# Altium PCB 0.PCB1.PcbDoc (part 8 of 8)
Units mil, origin at the board's own origin, x right, y up, seen from the top; angles counter-clockwise.
Board outline 3897.64 x 3897.64 mil, 6 copper layers (Top Layer, Layer 1, Layer 3, Layer 4, Layer 2, Bottom Layer), stack 60.567 mil thick; 715 components, 563 nets, 2530 pads, 1442 vias.
Unrouted connection lines stored in the file: 6.
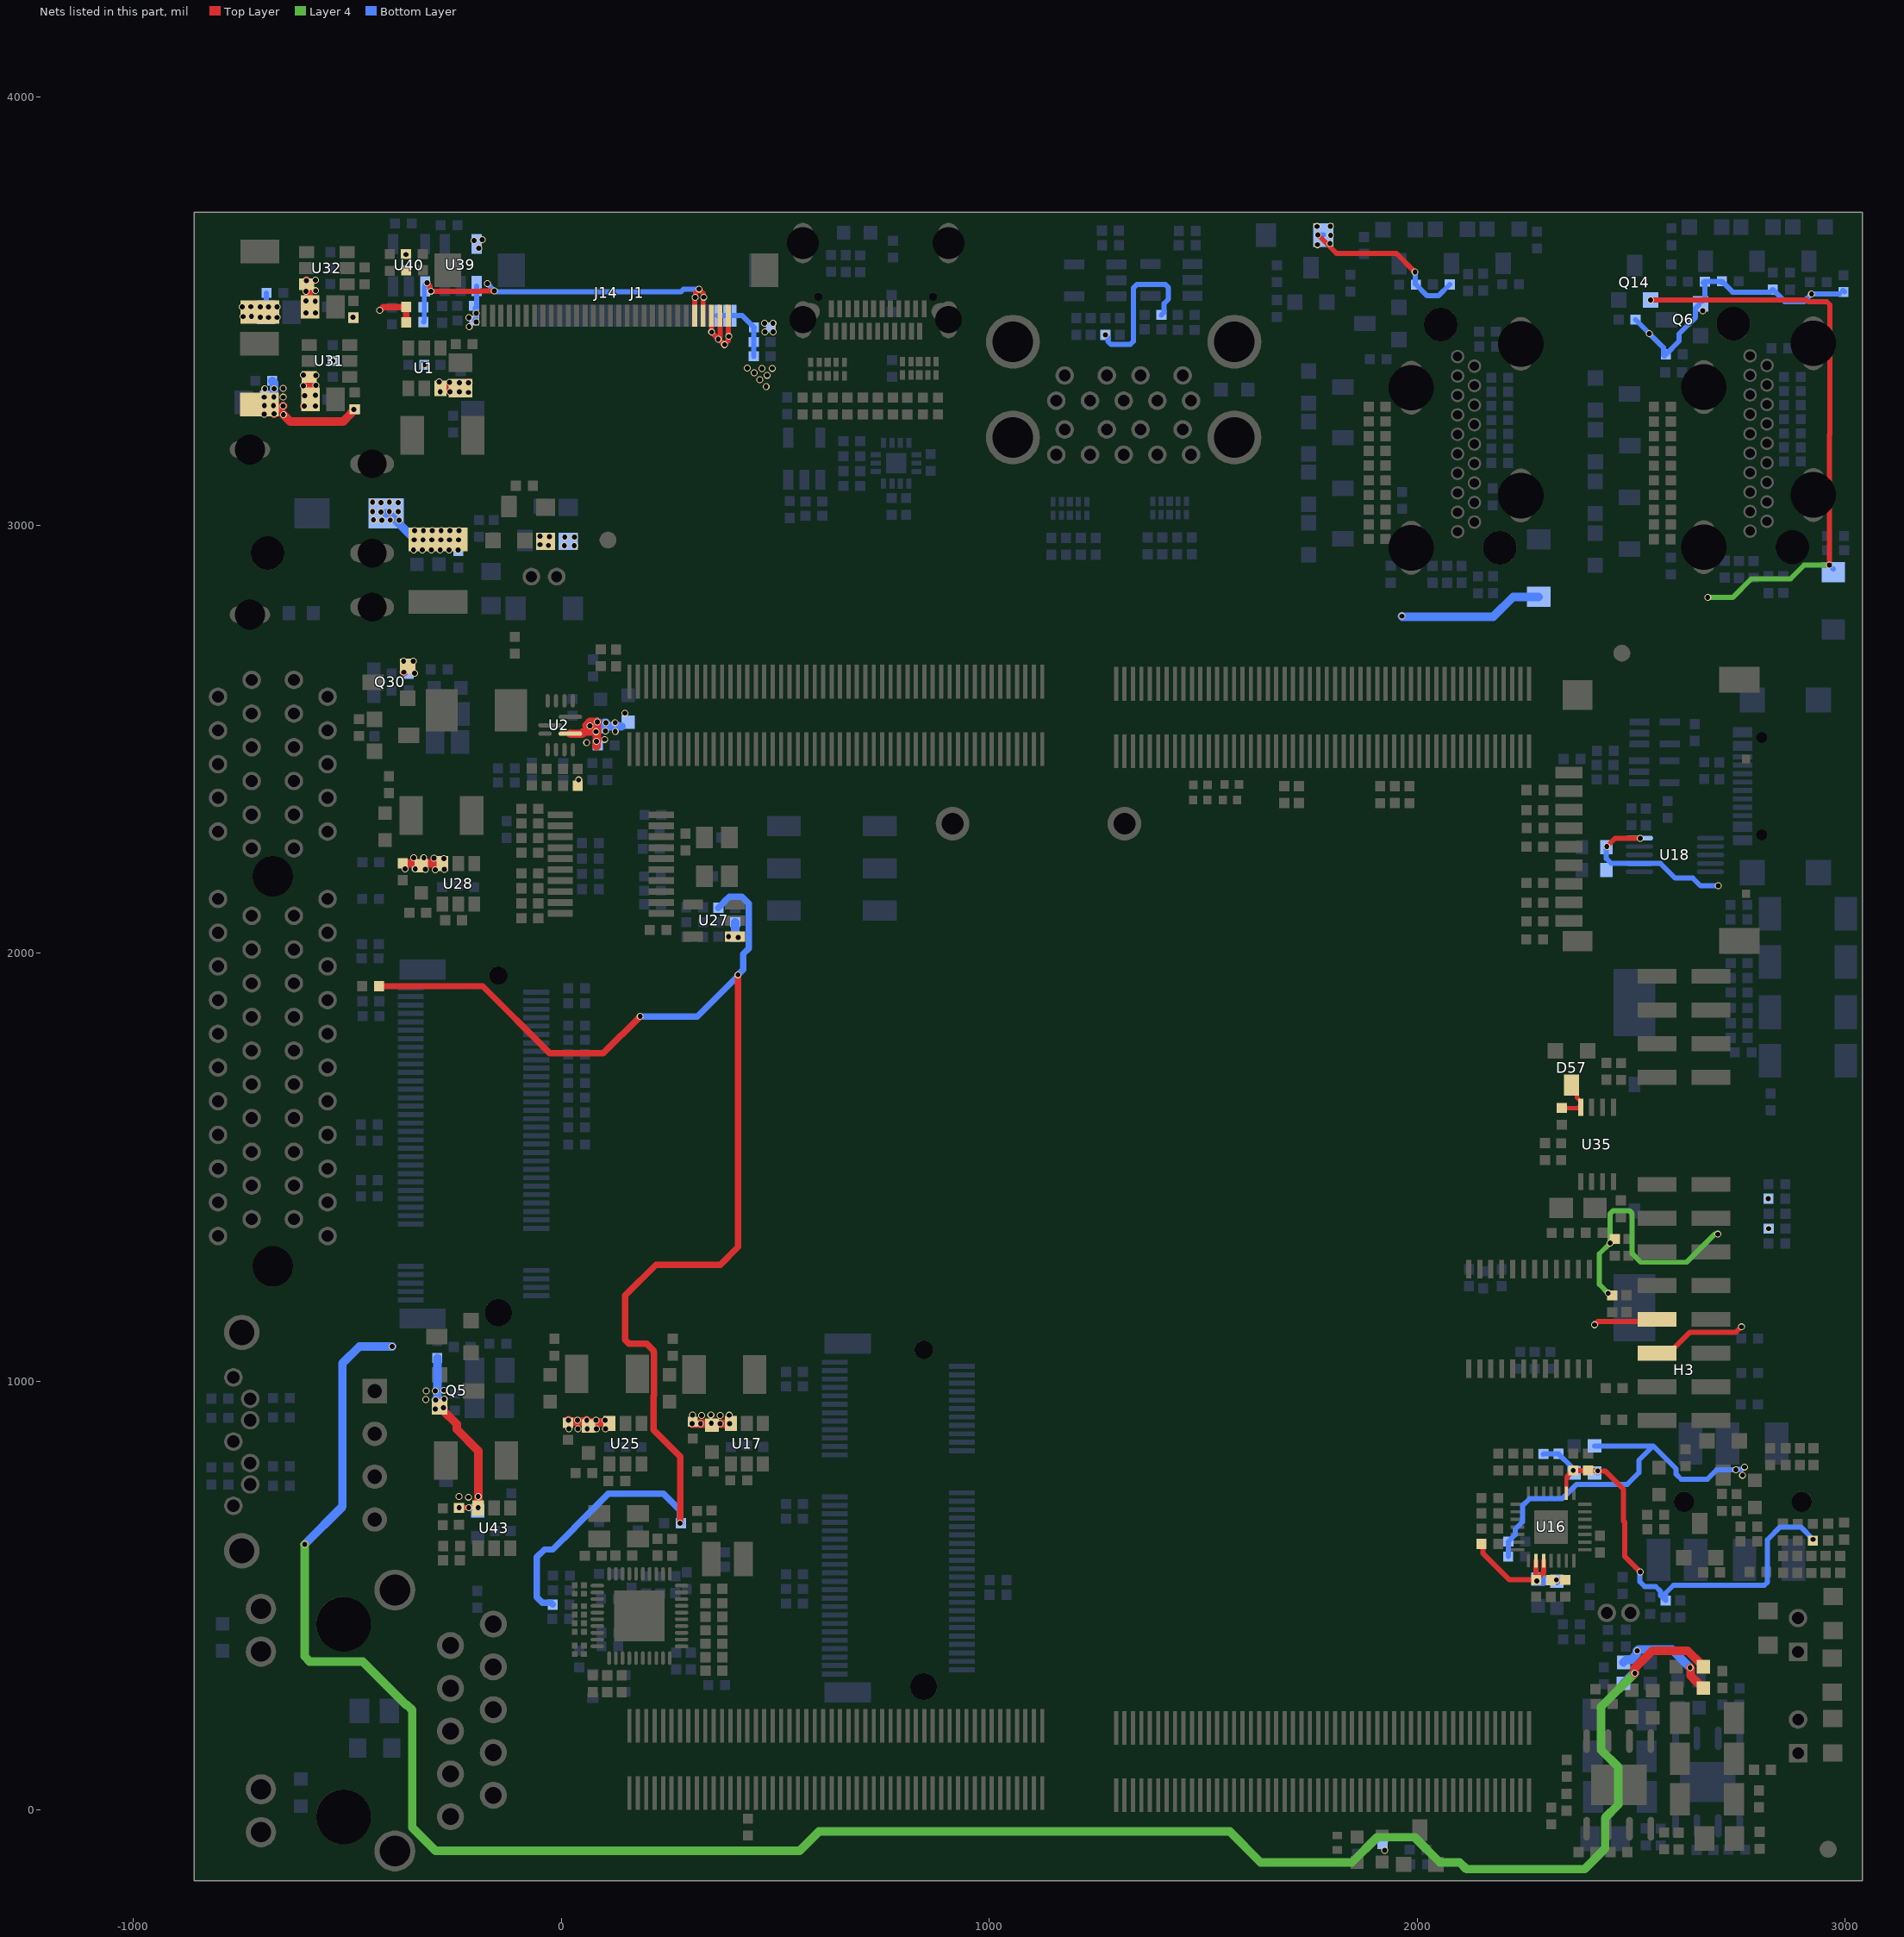
[diagram p12: the nets of this part, all layers, seen from the top]

## Via types
v1: diameter 16.14, hole 11.81, Top Layer to Bottom Layer, tented both sides, 1434 vias
v2: diameter 16.14, hole 11.81, Top Layer to Bottom Layer, 8 vias

## Nets (pads, with @x,y where several pads share a name; then routed paths per layer and width w, separated by ;. In a path a pad name is that pad's centre, name@x,y a point inside that pad or via, vN(x,y) a via of type N, cw(c..) or ccw(c..) an arc to the next point about the centre after c; other vN are vias at no path point) (continued)
VCC_3V3_S0: C35.2 C36.2 C230.1 C231.1 C232.2 D49.2 H3.6 L15.1 L21.2 Q6.1 R6.2 R25.1 R26.1 R27.1 R28.1 R29.1 R30.1 R31.1 R32.1 R33.1 R34.1 R65.2 R128.1 R151.1 R153.1 R154.1 R157.1 R158.1 R170.1 R178.1 R179.1 R246.2 R272.2 R328.1 R382.2 R383.2 U18.7 U18.10 | length 7134
  Top Layer w12: v1(1768.1,3678.4) 1811.6,3634.9 1951.4,3634.9 v1(1994.9,3591.4) ; v1(2443.08,2249.38) 2462.43,2268.72 v1(2521.06,2268.72) ; v1(2446.22,1206) 2447.01,1205.21 2451.27,1205.21 R27.1@2455.6,1200.88 ; v1(2450.8,1323.3) 2452.42,1323.3 R28.1@2461.7,1332.58 ; H3.6@2560.51,1066.24 2588.27,1066.24 2637.23,1115.2 2744.58,1115.2 2756.78,1127.4 v1(2757.9,1127.4)
  Top Layer w15: R328.1@-425.42,1923.3 -183.3,1923.3 -26.4,1766.4 98.4,1766.4 v1(184.6,1852.6) ; v1(-423.7,3502.1) -415.8,3510 R26.1@-361.96,3510 -362.02,3509.94 -362.02,3474.48 R25.1@-362.9,3473.6 ; v1@278.6,671.1 278.6,824 215.8,886.8 215.8,966.3 217.06,967.56 217.06,1067.64 215.8,1068.9 215.8,1072 199.5,1088.3 158.19,1088.3 149.4,1097.09 149.4,1200.6 221.5,1272.7 371.8,1272.7 413.2,1314.1 v1(413.2,1949.9)
  Layer 4 w12: v1(2446.22,1206) 2425.4,1226.82 2425.4,1297.9 v1(2450.8,1323.3) 2450.8,1391.87 2457.83,1398.9 2495.27,1398.9 2502.3,1391.87 2502.3,1298.2 2522.1,1278.4 2629.4,1278.4 2694.9,1343.9 v1(2702.2,1343.9)
  Bottom Layer w12: C230.1@-689.04,3497.48 -688.51,3498 C230.1@-688.51,3510.09 ; C231.1@-688.51,3542.78 C230.1@-688.51,3510.09 ; v1(-683.39,3510.09) C230.1@-688.51,3510.09 ; v1(1271.4,3444.75) 1277.2,3438.95 1277.2,3429.53 1284.23,3422.5 1329.67,3422.5 1336.7,3429.53 1336.7,3554.23 1344.7,3562.23 1411.87,3562.23 1418.9,3555.2 1418.9,3528.3 1408.48,3517.88 1408.48,3497.13 R34.1@1402.68,3491.33 ; v1(1768.1,3678.4) 1768.46,3678.04 D49.2@1780.63,3678.04 ; v1(1994.9,3591.4) 1995.69,3590.61 1995.69,3563.55 2023.1,3536.14 2049.67,3536.14 R178.1@2075.98,3562.44 ; R29.1@2212.72,590.8 2212.87,590.95 2212.87,625.75 R30.1@2213.02,625.9 2229.1,641.98 2229.1,654.9 2246,671.8 2246,709.5 2262.2,725.7 2338.3,725.7 2372.4,759.8 2491,759.8 2517.7,786.5 2517.7,815.81 2551.24,849.36 ; L15.1@2414.34,849.36 2551.24,849.36 ; C36.2@2441.9,2248.32 2441.95,2248.27 2441.95,2221.32 2453.12,2210.15 U18.7@2519.02,2210.15 2568.15,2210.15 2602.2,2176.1 2643.6,2176.1 2661.8,2157.9 v1(2703.2,2157.9) ; R170.1@2509.98,3480.31 2575.02,3415.27 R151.1@2575.02,3399.21 ; U18.10@2519.02,2269.21 2520.57,2269.21 v1(2521.06,2268.72) ; R151.1@2577.1,3395.31 2575.02,3397.39 R151.1@2575.02,3399.21 ; R151.1@2578.2,3399.21 R151.1@2575.02,3399.21 ; R151.1@2580.82,3399.21 2611.76,3430.15 2611.76,3447.17 2650.2,3485.61 2650.2,3507.21 Q6.1@2658.5,3515.51 ; Q6.1@2662.1,3523.11 2665.68,3523.11 2671.98,3529.41 R158.1@2671.98,3569.11 2672.43,3569.56 2708.05,3569.56 R157.1@2710.4,3567.21 ; R158.1@2667.97,3566.88 R158.1@2669.8,3568.71 ; R157.1@2711.72,3570.01 2737.02,3544.71 2817.77,3544.71 2824.8,3544.73 R153.1@2830.6,3550.53 2858.72,3522.41 2903.5,3522.41 v1(2921.3,3540.21) R154.1@2986.8,3540.21 ; v1@2745.9,793.47 2699.73,793.47 2677.73,771.47 2616.72,771.47 2605.06,783.12 2605.06,795.54 2551.24,849.36 ; v1@2746.24,794.26 2758.52,794.26 2764.33,800.06 v1(2764.88,800.06) ; R154.1@2994.4,3548.09 2994.9,3548.59 R154.1@2997.9,3545.59
  Bottom Layer w15: R383.2@-19.78,478.6 -24.08,482.9 -43.7,482.9 -56.7,495.9 -56.7,589.5 -38.9,607.3 -19.9,607.3 30.35,657.55 30.35,658.18 109.87,737.7 239.21,737.7 277.18,699.72 277.18,689.72 277.62,689.28 277.62,671.08 R382.2@280,668.7 278.2,668.7 v1(277.8,669.1) ; v1(184.6,1852.6) 318,1852.6 v1@411.9,1946.5 ; R246.2@367.3,2106.43 382.21,2121.34 382.21,2121.84 392.67,2132.31 422.41,2132.31 438.2,2116.51 438.2,2011.7 425.3,1998.8 425.3,1962 v1(413.2,1949.9)
  other v1: 1923.8,-95.53 2760.17,780.95 2744.98,793.47 2821.14,1357 2820.44,1426.7 -319.6,3374.91 -533.61,3383.8 2542.5,3447.79 -683.39,3485.37 -703.07,3485.88 -663.71,3485.5 -486.41,3486.13 -743.2,3487.5 -723.52,3488.04 2666.9,3501.2 -745,3510.2 -703.07,3509.77 -663.71,3510.3 -725.2,3510.5 1767,3655.5 1796.4,3657.8 1797.55,3677.45 1766.03,3697.98 1796.8,3698.7
VCC_5V0_S0: C184.1 C185.1 C225.2 C226.1 C227.1 D26.2 D33.2 H3.8 L20.2 Q14.1 R36.2 R37.1 R127.1 R342.1 R348.1 U27.1 U39.5 | length 2471.4
  Top Layer w12: v1(2414.6,1132.4) 2421.92,1139.72 2555.25,1139.72 H3.8@2560.51,1144.98 ; v1(2545.6,3526.21) 2909.74,3526.21 2913.81,3522.14 2956.97,3522.14 2964,3515.11 2964,3212.97 2963.1,3212.07 v1(2963.1,2906.91)
  Top Layer w20: L20.2@-704.59,3282.13 -696.73,3282.13 L20.2@-693.64,3279.04 ; v1(-693.29,3279.38) L20.2@-693.64,3279.04 ; L20.2@-672.15,3279.05 -672.1,3279 L20.2@-672.1,3267.35 ; v1(-672.15,3279.74) -672.15,3276.55 -669.32,3273.71 -654.1,3273.71 v1(-649.54,3278.27) ; v1(-670.8,3260.1) -670.8,3264.57 -674.48,3268.25 -682.85,3268.25 L20.2@-693.64,3279.04 ; v1(-648.9,3258.6) -632.9,3242.6 -509.03,3242.6 -491.18,3260.44 -491.18,3261.75 C225.2@-482.19,3270.74 ; v1(2637.41,331.25) 2638.76,329.9 2638.76,312 2649.93,300.82 2651.03,300.82 R342.1@2662.21,289.65
  Layer 4 w12: v1(2678.76,2831.29) 2736.79,2831.29 2780.4,2874.9 2872.1,2874.9 2904.11,2906.91 v1(2963.1,2906.91)
  Bottom Layer w12: Q14.1@2545.5,3526.51 2545.6,3526.41 v1(2545.6,3526.21) ; v1(2963.1,2906.91) D26.2@2972.23,2897.78
  Bottom Layer w20: C226.1@-682.69,3286.9 -682.69,3287.95 v1(-671.24,3299.4) ; C226.1@-676.95,3293 -670.8,3299.14 v1@-670.8,3318.7 ; C227.1@-675.09,3337.2 -670.79,3332.9 v1(-670.79,3319.08) ; C184.1@406.66,2072.72 C185.1@406.66,2039.01 412.19,2039.01 v1(413.8,2037.4) ; v1(1964.6,2787.7) 1965.7,2786.6 2178.01,2786.6 2224.13,2832.72 D33.2@2283.7,2832.72 ; R348.1@2482.01,343.65 2487.76,349.4 2499.54,349.4 2513.41,363.27 2513.41,370.31 2516.5,373.4 2595.26,373.4 v1(2637.41,331.25)
  other v1: 2514.1,371 391.17,2039.4 30.7,2952.3 7.4,2952.5 8.5,2972.3 30.8,2972.7 -693.6,3259.7 -484.16,3270.2 -693.59,3299.07 -649.2,3299.2 -692.35,3319.12 -649.2,3319.6 478.8,3324.2 463.9,3339.8 481.2,3350.5 451.34,3356.2 468.8,3366.2 435.1,3367.4 493.1,3366.5 475.81,3451.87 495.5,3451.87 475.15,3471.63 494.84,3471.54 -192.3,3646.9 -203.59,3665.09 -184,3667
VCC_12V: C1.1 C2.1 C3.1 C12.1 C13.1 C17.1 C18.1 C19.1 C160.1 C161.1 C195.1 C196.1 C228.1 C229.1 C233.1 C234.1 C249.1 C250.1 C293.1 C294.1 D1.2 F1.2 Q5.2 Q30.2 R9.1 R131.1 R255.1 R319.1 R341.1 R347.1 U1.3 U2.1 U17.3 U25.3 U28.3 U31.3 U32.3 U43.3 | length 6403
  Top Layer w12: C294.1@-238.62,704.35 -238.39,704.58 -194.05,704.58 v1(-193.82,704.81)
  Top Layer w20: v1(-600.2,3278.5) -597.55,3278.5 -585.89,3290.15 C228.1@-585.89,3293.8 -587.31,3295.22 -587.31,3344.98 U31.3@-588.74,3346.4 ; v1(-596.26,3496.3) -596.26,3496.94 -586.21,3506.99 C233.1@-586.21,3510.18 -590.28,3514.25 -590.28,3559.49 -594.06,3563.27 U32.3@-594.35,3563.27 -594.35,3570.55 v1(-595.5,3571.7) ; C196.1@-369.98,2210.28 -369.51,2209.81 -278.25,2209.81 U28.3@-277.78,2209.34 ; v1(-367.7,2656.9) -366.85,2657.75 -366.85,2662.85 Q30.2@-358.85,2670.85 ; Q5.2@-284.32,940.7 -276.75,940.7 v1(-274.88,938.84) ; U1.3@-282.45,3320.27 -235.39,3320.27 C12.1@-234.9,3320.77 -228.99,3320.77 -216.66,3333.1 v1(-216.5,3333.1) ; Q5.2@-276.32,938.6 -276.32,932.7 -244.08,900.45 -244.08,888.38 -193.82,838.12 v1(-193.82,704.81) ; v1(16.67,909.2) 16.1,908.62 C161.1@16.1,903.18 19.7,906.78 C160.1@56.39,906.78 ; U2.1@21.5,2513.1 21.85,2512.75 48.63,2512.75 53.71,2517.83 v1(81.37,2517.83) 83.77,2517.83 83.81,2517.79 v1@83.81,2495.69 ; 59.09,2532.48 67.51,2540.91 84.59,2540.91 v1(84.74,2540.76) ; v1(59.72,909.2) 59.72,899.78 C160.1@63.5,896 C160.1@71.72,904.22 ; C160.1@64.6,904.22 U25.3@108.25,904.22 ; v1(82.14,2495.32) 82.78,2495.32 82.78,2484.04 82.93,2483.89 ; v1@83.81,2517.99 v1@83.81,2539.49 ; U25.3@107.75,904.22 111.56,900.41 U25.3@112.8,901.64 ; v1(305.85,901.62) 307.67,903.44 C250.1@307.67,905.78 ; C250.1@310.58,902.87 312.45,901 v1(325.53,901) C249.1@349.17,901 ; v1(350.7,902.2) 350.7,899.47 C249.1@352.27,897.9 355.37,901 392.81,901 U17.3@393.4,901.59 ; v1(393.4,901.4) 396.31,901.4 U17.3@396.5,901.59 ; v1(2508.41,318.35) 2508.21,318.55 2508.21,330.05 2548.82,370.66 2631.94,370.66 2662.76,339.84 2662.76,339.3 R341.1@2668.51,333.55
  Layer 4 w20: v1(-599.4,619.2) -599.4,357.52 -587.68,345.8 -463.6,345.8 -361.9,244.1 -359.62,244.1 -347.9,232.38 -347.9,-42.4 -293.6,-96.7 557.2,-96.7 602.3,-51.6 1562.32,-51.6 1634.12,-123.4 1847.6,-123.4 1906.3,-64.7 1994.1,-64.7 2053.2,-123.8 2099.4,-123.8 2114.9,-139.3 2390.9,-139.3 2439.1,-91.1 2439.1,-19.5 2469.7,11.1 2469.7,99.4 2429.8,139.3 2429.8,239.74 v1(2508.41,318.35)
  Bottom Layer w12: C293.1@-194.62,697.87 -194.62,704.01 v1(-193.82,704.81)
  Bottom Layer w20: v1(-599.4,619.2) -511.1,707.5 -511.1,1042.1 -471.5,1081.7 v1(-394.9,1081.7) ; D1.2@-408.89,3027.7 -402.98,3027.7 -352.53,2977.25 -342.75,2977.25 C1.1@-337,2971.5 -336.5,2971 C1.1@-336.5,2970.2 ; v1(-293.02,956.59) -288.72,960.89 R319.1@-288.72,1054.82 ; v1@-288.72,950.32 -277.24,938.84 v1(-274.88,938.84) ; v1(84.74,2540.76) 86.1,2539.4 86.1,2535.95 91.74,2530.31 91.95,2530.31 100.46,2538.82 v1(104.32,2538.82) ; C18.1@103.61,2530.1 135.06,2530.1 135.17,2529.99 C17.1@140.81,2529.99 ; R347.1@2481.91,292.55 2481.91,294.65 2501.16,313.9 2503.96,313.9 v1(2508.41,318.35)
  other v1: -238.27,704.7 -215.99,704.81 -216.67,729.63 -238.57,731.03 -193.87,731.03 17.7,889.5 39.22,889.5 60.75,889.5 82.27,889.5 103.8,889.5 371.2,901 38.2,909.2 81.25,909.2 102.77,909.2 306.81,921.29 328.32,920.7 371.38,920.7 392.89,921.08 349.8,921.86 -294.3,935.6 -315.9,957.5 -273.42,958.47 -315.4,978 -294.1,977.8 -273.8,979.3 -317.5,2196.2 -294,2195.5 -273,2196.2 -364.3,2197.3 -341,2197.4 -273.8,2221.4 -297.3,2222.1 -344.1,2223.2 -320.8,2223.3 40.71,2405.16 59.71,2492.09 101.36,2499.59 126.34,2517.99 103.92,2519.11 67.31,2531.61 126.14,2538.89 149.18,2561.1 -342.3,2654.2 -368.1,2682.1 -345.2,2682.3 -344.83,2941.9 -324.08,2941.9 -303.34,2941.9 -282.59,2941.9 -261.85,2941.9 -241.1,2941.9 -29.8,2952.8 -49.37,2954.95 -343.53,2965.8 -322.78,2965.8 -302.04,2965.8 -281.29,2965.8 -260.55,2965.8 -239.8,2965.8 -27.5,2973.6 -49.37,2974.63 -342.63,2987.7 -321.88,2987.7 -301.14,2987.7 -280.39,2987.7 -259.65,2987.7 -238.9,2987.7 -418.86,3011.41 -438.53,3012.38 -399.2,3012.3 -378.4,3011.7 -420.96,3031.21 -440.63,3032.18 -401.3,3032.1 -380.5,3031.5 -420.86,3052.81 -380.4,3053.1 -440.53,3053.78 -401.2,3053.7 -573.7,3278.8 -599.5,3303 -573.7,3303.4 -216.92,3310.35 -282.4,3311.8 -259.8,3311.6 -237.4,3311.6 -602.3,3325.7 -573.1,3326.6 -237.4,3333.2 -260.7,3334.2 -284.8,3334.6 -572.8,3349.7 -602.4,3350.7 -573.8,3496 -574.6,3523.2 -596.1,3524 -596,3546.1 -573.6,3547.9 -573.8,3572.8
VCC_RTC: C237.1 D57.3 U35.8 | length 108
  Top Layer w10: C237.1@2337.7,1638.68 2375.38,1638.68 U35.8@2380.1,1643.4 ; D57.3@2361.4,1695.5 2373.4,1683.5 2373.4,1662.61 2381.91,1654.09 U35.8@2381.91,1640.31
VCCA1V8_CODEC: C108.1 C114.1 C123.1 L4.2 L14.2 R121.1 U16.2 U16.3 | length 338.9
  Top Layer w12: R121.1@2149.95,620.45 2153.33,617.07 2153.33,598.77 2215.65,536.45 2276.31,536.45 v1(2279.16,533.6) ; U16.2@2277.54,581.18 2277.87,580.84 C114.1@2277.87,536.78 ; C114.1@2278.21,536.45 2295.25,553.49 U16.3@2295.25,581.18 ; v1(2325.31,536.34) 2345.7,536.34 C123.1@2345.81,536.23
  Bottom Layer w20: v1(2279.16,533.6) L14.2@2325.31,533.6
VCCA3V3_CODEC: C109.1 C110.1 C124.1 L5.2 L15.2 R112.2 R113.2 R125.1 U16.16 | length 1114.7
  Top Layer w10: U16.16@2348.4,738.66 2348.4,773.2 2349.77,774.57
  Top Layer w12: 2349.77,774.57 2351.21,776.01 2351.21,778.75 v1(2364.41,791.95) C110.1@2399.41,791.95 2399.91,791.45 2421.41,791.45 v1(2421.91,790.95) 2422.7,790.16 2439.97,790.16 2482.26,747.87 2482.26,674.22 2484.68,671.81 2484.68,591.55 v1(2520.91,555.32) ; R113.2@2924.31,628.04 2924.31,630.42 v1(2924.81,630.92)
  Bottom Layer w12: R112.2@2294.91,830.23 2295.11,830.43 2329.91,830.43 C124.1@2330.11,830.63 2360.96,799.78 2360.96,795.4 v1(2364.41,791.95) 2366.61,789.75 L5.2@2370.71,789.75 ; L15.2@2418.79,789.65 2420.61,789.65 v1(2421.91,790.95) L15.2@2421.91,786.52 ; v1(2520.91,555.32) 2520.11,554.53 2520.11,532.23 2520.01,532.12 2531.47,520.65 2557.34,520.65 2568.81,509.19 2568.81,499.94 R125.1@2580.47,488.27 2580.47,505.59 2598.76,523.89 2811.1,523.89 2818.4,531.19 2818.4,630.6 2847.7,659.9 2895.83,659.9 v1(2924.81,630.92)
VDD_CAM0_5V: C29.1 C30.1 J1.1 J1.2 J1.3 R37.2 | length 165.4
  Bottom Layer w12: J1.3@364.21,3489.66 J1.1@403.58,3489.66 422.96,3489.66 R37.2@450.52,3462.1 450.22,3461.8 450.22,3395 C29.1@449.92,3394.7
VDD_LCD0_3V3: C260.1 C261.1 J14.4 J14.5 R301.1 R303.1 U40.1 | length 898.7
  Top Layer w12: v1(-313.53,3566.4) -313.53,3565.28 -306.28,3558.03 -306.28,3552.31 -300.42,3546.45 -188.57,3546.45 -187.32,3547.7 v1(-156.5,3547.7) ; J14.5@311.98,3489.52 312.08,3489.62 312.08,3529.96 313.2,3531.08 v1(313.2,3532.2) 313.81,3532.81 313.81,3542.19 v1@322.3,3550.68 ; v1(322.3,3551.8) v1@322.3,3550.68 ; J14.4@331.66,3489.52 v1@331.66,3532.64 ; v1(332.88,3532.64) 332.09,3533.44 332.09,3540.89 v1@322.3,3550.68
  Bottom Layer w12: C261.1@-321.62,3475 -319.81,3476.81 -319.81,3509.3 U40.1@-319.81,3556.18 ; U40.1@-318,3557.99 -318,3561.93 v1(-313.53,3566.4) ; v1(-172,3564.4) -172,3563.8 -157.55,3549.35 v1@-157.55,3548.45 ; v1(-156.5,3547.7) -155.71,3546.91 -151.98,3546.91 -150.33,3545.25 63.31,3545.25 63.44,3545.13 279.69,3545.13 286.36,3551.8 v1(322.3,3551.8)
  other v1: -304,3546.8 -362.3,3632.4
VDD_LCD0_5V: C256.1 C257.1 J14.1 J14.2 J14.3 U39.1 | length 287.7
  Top Layer w12: J14.3@351.35,3489.52 351.45,3489.43 351.45,3451.55 v1(351.7,3451.3) 351.7,3450.18 361.05,3440.83 361.05,3440.75 v1(366.97,3434.83) ; v1@368.22,3434.7 368.22,3434.63 380.85,3422 v1(381.9,3422) ; v1@368.2,3436.5 371.03,3439.33 J14.2@371.03,3489.52 ; v1@380.9,3422.6 381.38,3422.6 390.72,3431.94 J14.1@390.72,3489.52
  Bottom Layer w12: C256.1@-202.92,3478.6 -198.92,3482.6 -198.92,3494.28 v1(-198.12,3495.07) ; v1@-200.13,3495.07 C257.1@-200.13,3508 ; C257.1@-197.33,3508 U39.1@-197.33,3558.67
  other v1: 391.52,3441.21 -214.97,3464.12 -198.7,3475.2 -215.78,3484.98
pads on no net: BTB_1.21 BTB_1.22 BTB_1.24 BTB_1.25 BTB_1.26 BTB_1.27 BTB_1.29 BTB_1.30 BTB_1.32 BTB_1.33 BTB_1.34 BTB_1.35 BTB_1.67 BTB_1.68 BTB_1.69 BTB_1.70 BTB_1.72 BTB_1.73 BTB_1.75 BTB_1.76 BTB_1.77 BTB_1.78 BTB_1.80 BTB_1.81 BTB_2.33 BTB_2.34 BTB_2.35 BTB_2.36 BTB_2.38 BTB_2.39 BTB_2.41 BTB_2.42 BTB_2.43 BTB_2.44 BTB_2.52 BTB_2.53 BTB_2.54 BTB_2.55 BTB_2.56 BTB_2.57 BTB_2.58 BTB_2.59 BTB_2.60 BTB_2.61 BTB_2.62 BTB_2.63 BTB_2.64 BTB_2.67 BTB_2.69 BTB_2.70 BTB_2.76 BTB_2.78 BTB_2.80 BTB_2.82 BTB_2.83 BTB_2.85 BTB_2.86 BTB_2.87 BTB_2.90 BTB_2.91 BTB_3.6 BTB_3.14 BTB_3.57 BTB_4.52 BTB_4.53 BTB_4.54 BTB_4.55 BTB_4.56 BTB_4.57 BTB_4.58 BTB_4.59 CR1.0 J1.13 J1.14 J5. J7. J8.@600.94,3533.73 J8.@868.66,3533.73 J9.14 J9.15 J9.17 J9.18 J11. J11.7 J11.8 J13. J13.6 J13.8 J13.9 J13.10 J13.11 J13.12 J13.13 J13.14 J13.15 J13.16 J13.17 J13.19 J13.20 J13.21 J13.22 J13.23 J13.32 J13.34 J13.36 J13.38 J13.40 J13.42 J13.44 J13.46 J13.48 J13.50 J13.54 J13.58 J13.59 J13.60 J13.61 J13.62 J13.64 J13.65 J13.66 J13.67 J13.68 J13.70 J13.71 J13.73 J14.14 J16. J17. J19. J19.5 J19.6 J19.7 J19.8 J19.11 J19.13 J19.17 J19.19 J19.20 J19.22 J19.23 J19.24 J19.25 J19.26 J19.28 J19.30 J19.32 J19.34 J19.36 J19.40 J19.42 J19.44 J19.46 J19.48 J19.56 J19.58 J19.67 J19.68 J19.69 J20. J20.A5 J20.A6 J20.A7 J20.A8 J20.A19 J20.A25 J20.A26 J20.A29 J20.A30 J20.A32 J20.B5 J20.B6 J20.B9 J20.B23 J20.B24 J20.B27 J20.B28 J20.B30 J24. MR1.Mark MR2.Mark MR3.Mark MR4.Mark MR5.Mark MR6.Mark U2.4 U4.1 U16.9 U16.25 U18.4 U18.5 U18.6 USBC1. USBC1.A4B9 USBC1.A5 USBC1.A8 USBC1.B4A9 USBC1.B5 USBC1.B8
copper on no net:
  other v2: 1259.09,161.13 2298.46,161.13 122.09,166.13 1161.46,166.13 1259.09,2600.13 2298.46,2600.13 122.09,2605.13 1161.46,2605.13

## Polygon pours and split planes (outlines as drawn)
GND on Bottom Layer "GND_L06_P090" (solid, remove dead copper, pour order 90): -857.1,-166.7 3040.6,-166.7 3040.6,3730.9 -857,3730.9
3V3_DVDD_PHY1 on Bottom Layer "3V3_DVDD_PHY1_L06_P032" (solid, remove dead copper, pour order 32): 229.3,680.9 229.3,657.8 229.1,657.6 247.1,639.6 247.1,621.8 252.3,621.8 270.6,603.5 270.5,603.4 270.5,581.3 288.1,581.3 304.3,565.1 304.3,543.5 271.2,543.5 243.8,516.1 189.1,516.1 189.1,514.9 176.8,502.6 177,502.4 177,468.5 185.5,460 208,460 208,460.1 212.2,464.3 282.1,464.3 332.2,514.4 332.2,594.8 304.6,622.4 304.6,635.4 302.6,635.4 281.4,656.6 267.5,656.6 267.5,674.8 262.4,679.9
1V05_PHY1 on Bottom Layer "1V05_PHY1_L06_P025" (solid, remove dead copper, pour order 25): 404.6,625.1 405.1,624.6 447.7,624.6 447.7,601.9 467.8,581.8 467.8,251.5 424.4,208.1 36.5,208.1 4.2,240.4 4.2,331.9 17.8,345.5 53.2,345.5 60.5,338.2 60.2,337.9 60.2,253.2 65,248.4 138.7,248.4 167.4,277.1 170.1,274.4 351.3,274.4 362.1,285.2 362.1,302.9 372.3,313.1 388.1,313.1 394,319 390.2,322.8 390.2,542.7 404.1,556.6 404.1,624.9
1V05_DVDD_PHY1 on Bottom Layer "1V05_DVDD_PHY1_L06_P024" (solid, remove dead copper, pour order 24): 257.2,377.8 314.2,377.8 355.3,336.7 355.3,278.8 355.1,278.6 238.9,278.6 223.9,293.6 223.9,378.18
1V05_AVDD_PHY1 on Bottom Layer "1V05_AVDD_PHY1_L06_P023" (solid, remove dead copper, pour order 23): 105.9,369.7 116.9,380.7 116.9,500 125.1,508.2 175.5,508.2 175.5,525.7 167.1,534.1 50.1,534.1 35.2,519.2 35.2,377.5 45.3,367.4 86,367.4
NetC303_1 on Bottom Layer "NETC303_1_L06_P084" (solid, remove dead copper, pour order 84): 2666.8,189.5 2666.8,119.8 2659.7,112.7 2614,112.7 2614,4.3 2577.6,-32.1 2523.2,-32.1 2523.2,-91.2 2514.2,-100.2 2511.1,-97.1 2451.3,-97.1 2451.3,253.4 2422.9,281.8 2422.9,307.1 2444.9,307.1 2473.5,278.5 2496.5,278.5 2496.5,285.3 2519.9,308.7 2519.4,309.2 2519.4,354.6 2524.7,354.6 2530.6,360.5 2568,360.5 2591.3,337.2 2591.3,143.2 2596.3,138.2 2619.5,138.2 2637,155.7 2637,189.8
VCC_3V3_S0 on Bottom Layer "VCC_3V3_S0_L06_P078" (solid, remove dead copper, pour order 78): -8.6,467.7 -10.9,465.4 -82.5,465.4 -105.7,488.6 -105.7,599.5 -92.6,599.5 57.3,749.4 276.8,749.4 305.1,721.1 305.1,658.5 267.8,658.5 264.6,661.7 264.6,685.3 76.2,685.3 -32.4,576.7 -32.4,499.4 -24.2,491.2 -23.7,491.7 -8.6,491.7
GND on Bottom Layer "GND_L06_P022" (solid, remove dead copper, pour order 22): -258.4,2466 -257.4,2465 -213,2465 -213,2652.9 -241.4,2681.3 -277.6,2681.3 -277.6,2654.2 -257,2633.6 -257,2464.9
GND on Bottom Layer "GND_L06_P060" (solid, remove dead copper, pour order 60): -359.8,2926.4 -228.4,2926.4 -223,2921 -223,2885.6 -229.5,2879.1 -354.9,2879.1 -361.98,2886.18
VDD_LCD0_3V3 on Bottom Layer "VDD_LCD0_3V3_L06_P052" (solid, remove dead copper, pour order 52): -177.4,3578.7 -176.7,3579.4 338,3579.4 349.5,3567.9 349.5,3524.2 344.6,3519.3 343.3,3520.6 -166.3,3520.6 -185.5,3539.8 -185.5,3580.3
VCC5V0_USB20_HOST on Bottom Layer "VCC5V0_USB20_HOST_L06_P040" (solid, remove dead copper, pour order 40): 1471.2,3699.2 1553.6,3699.2 1578.8,3674 1578.8,3507.9 1570.5,3499.6 1505.6,3499.6 1498.8,3506.4 1498.8,3582.7 1497.3,3582.7 1495,3585 1494.1,3584.1 1453,3584.1 1453,3589 1446.6,3595.4 1446.6,3632.4 1459.9,3645.7 1459.9,3700.1
VCC_3V3_S0 on Bottom Layer "VCC_3V3_S0_L06_P077" (solid, remove dead copper, pour order 77): 2776.8,784.7 2731.4,739.3 2622.1,739.3 2532.3,829.1 2403,829.1 2394.7,837.4 2394.7,869.6 2400.8,875.7 2402.8,873.7 2574.4,873.7 2630.4,817.7 2777.7,817.7
VCC_3V3_S0 on Bottom Layer "VCC_3V3_S0_L06_P076" (solid, remove dead copper, pour order 76): -657.2,3469.8 -748.3,3469.8 -751.5,3473 -751.5,3538.3 -733.2,3556.6 -676.5,3556.6 -663.5,3543.6 -663.5,3525.3 -656.99,3525.3
VCC5V0_USB_S0 on Bottom Layer "VCC5V0_USB_S0_L06_P072" (solid, remove dead copper, pour order 72): 763.2,3045.6 764,3044.8 942.1,3044.8 1054.6,3157.3 1054.6,3540.1 1103.1,3588.6 1403.2,3588.6 1419.2,3604.6 1419.2,3731.6 918.1,3731.6 839.6,3653.1 839.6,3312.9 892.7,3259.8 892.7,3127 891.4,3127 873.9,3109.5 768.4,3109.5
VCC5V0_USB30_OTG on Bottom Layer "VCC5V0_USB30_OTG_L06_P042" (solid, remove dead copper, pour order 42): 1274,3700.64 1274,3584.3 1319.3,3584.3 1330.9,3572.7 1352.4,3572.7 1355.6,3575.9 1355.5,3576 1355.5,3700.74
VCC5V0_USB_S0 on Bottom Layer "VCC5V0_USB_S0_L06_P071" (solid, remove dead copper, pour order 71): 760.4,3046 761.3,3045.1 812.8,3045.1 819.3,3051.6 818.8,3052.1 818.8,3075.8 815.4,3075.8 799,3092.2 799,3109.2 767.1,3109.2 767.2,3109.1 767.2,3086.3 726.4,3086.3 721.1,3081 721.1,3044.94
SATA_12V on Bottom Layer "SATA_12V_L06_P036" (solid, remove dead copper, pour order 36): -457.5,737.1 -407.6,737.1 -358,786.7 -358,882.7 -305.5,935.2 -267.2,935.2 -234.7,967.7 -235,968 -235,1058.7 -225.2,1068.5 -163.6,1068.5 -154.8,1059.7 -155.6,1058.9 -155.6,762.5 -288.6,629.5 -470.1,629.5 -470.1,630.2 -483.8,643.9 -483.8,711.4
VDD_LCD0_5V on Bottom Layer "VDD_LCD0_5V_L06_P053" (solid, remove dead copper, pour order 53): -208.7,3581.9 -221,3569.6 -221,3470.2 -209.5,3458.7 -192.7,3458.7 -192.7,3459.4 -184.5,3467.6 -184.5,3582.7
VDD_CAM0_5V on Bottom Layer "VDD_CAM0_5V_L06_P048" (solid, remove dead copper, pour order 48): 358.7,3514.7 432.6,3514.7 462.4,3484.9 462.4,3382 439.1,3382 358.4,3462.7 358.4,3463.9
VDD_LCD0_3V3 on Bottom Layer "VDD_LCD0_3V3_L06_P051" (solid, remove dead copper, pour order 51): -334,3464.6 -311.1,3464.6 -310.4,3463.9 -291.7,3482.6 -291.7,3580.4 -299,3587.7 -334.5,3587.7 -334.5,3587.5 -342.7,3579.3 -342.7,3474.3
VCCA3V3_CODEC on Bottom Layer "VCCA3V3_CODEC_L06_P045" (solid, remove dead copper, pour order 45): 2283.9,842.2 2350.7,842.2 2390.5,802.4 2430.1,802.4 2430.1,770.9 2429.9,771.1 2351.9,771.1 2305,818 2284.5,818
VCC12V_PCIEx4 on Bottom Layer "VCC12V_PCIEX4_L06_P043" (solid, remove dead copper, pour order 43): -460.9,2634.3 -389.1,2634.3 -383.5,2639.9 -383.5,2682.3 -394.5,2693.3 -465.6,2693.3 -468.2,2690.7 -468.2,2639.9
VCC3V3_PCIECLK on Bottom Layer "VCC3V3_PCIECLK_L06_P037" (solid, remove dead copper, pour order 37): 72.8,2270.4 95.2,2292.8 201.5,2292.8 205.4,2288.9 203.6,2287.1 203.6,2121 231.7,2092.9 302.8,2092.9 313.3,2082.4 313.3,2024.9 310.6,2024.9 305.5,2019.8 148.7,2019.8 73.8,2094.7
M2PCIE_3V3 on Bottom Layer "M2PCIE_3V3_L06_P034" (solid, remove dead copper, pour order 34): -46.1,1815.4 -45.9,1815.6 26.8,1815.6 29.4,1813 29.3,1812.9 29.3,1581.3 -0.7,1581.3 -11.6,1592.2 -11.6,1728.5 -28.5,1745.4 -45.9,1745.4
M2PCIE_3V3 on Bottom Layer "M2PCIE_3V3_L06_P033" (solid, remove dead copper, pour order 33): -29.2,1918.7 -18.4,1929.5 26.7,1929.5 28.4,1927.8 28.4,1876.9 33.6,1876.9 68,1842.5 67.5,1842 67.5,1820.5 45.6,1820.5 45,1819.9 4.7,1860.2 4.7,1871.5 2.9,1871.5 -9.1,1883.5 -9.5,1883.1 -36.7,1883.1 -36.7,1917.8 -36.6,1917.9
3V3_AVDD_PHY1 on Bottom Layer "3V3_AVDD_PHY1_L06_P030" (solid, remove dead copper, pour order 30): 31,558.5 43.4,558.5 49.7,552.2 49.7,538.4 31.3,520 31.3,352.4 22.9,344 22.9,328.8 16.1,322 -1.9,322 -14.9,335 -14.9,417.3 3.2,435.4 3.2,559.5
1V8_DVDD_PHY1 on Bottom Layer "1V8_DVDD_PHY1_L06_P026" (solid, remove dead copper, pour order 26): 305.8,670.5 305.8,622.2 332,596 332,499.8 332.1,499.9 362.4,499.9 370.1,507.6 370.1,666.5 366.2,670.4
M2EKEY_3V3 on Bottom Layer "M2EKEY_3V3_L06_P009" (solid, remove dead copper, pour order 9): 782.3,1046.7 968.3,1046.7 968.3,1010.3 902.6,1010.3 881.1,988.8 881.1,367.6 896.7,352 897.1,352.4 966,352.4 966,320.1 965.4,319.5 965.1,319.8 837.4,319.8 782.3,374.9
VCC4V0_SYS on Bottom Layer "VCC4V0_SYS_L06_P021" (solid, remove dead copper, pour order 21): -321.72,2680.2 -316.7,2675.18 -316.7,2466.6 -273.1,2466.6 -271.8,2467.9 -271.8,2655.1 -297.8,2681.1
M2PCIE_3V3 on Bottom Layer "M2PCIE_3V3_L06_P010" (solid, remove dead copper, pour order 10): -125.4,1917.6 -124.8,1918.2 -27.6,1918.2 -25.7,1916.3 -25.7,1883.7 -93,1883.7 -98.2,1878.5 -98.2,1819.5 -94.1,1815.4 -26.7,1815.4 -26.7,1746.4 -27.6,1745.5 -28.2,1746.1 -100.2,1746.1 -119.2,1727.1 -119.2,1259.3 -106.5,1246.6 -28.5,1246.6 -28.5,1195 -40.7,1182.8 -40.7,1052.5 -29.2,1041 1,1041 1,1037.6 11.6,1027 11.6,991.1 2.5,982 -82.1,982 -104.2,1004.1 -104.2,1165.5 -111.2,1165.5 -199.7,1254 -199.7,1888.9 -169.7,1918.9
GND on Top Layer "GND_L01_P087" (solid, remove dead copper, pour order 87): -857,3731.2 -856.5,3730.7 3040,3730.7 3040,-167 3039.7,-166.7 -857,-166.7
VCC5V0_USB30_OTG on Top Layer "VCC5V0_USB30_OTG_L01_P041" (solid, remove dead copper, pour order 41): 1274.1,3621.7 1274.1,3423.5 1374.33,3323.27 1455.53,3323.27 1478.68,3346.42 1476.86,3348.23 1476.86,3360.21 1473.7,3360.21 1361.6,3472.32 1361.6,3611.3 1360.3,3611.3 1350.4,3621.2
NetC6_2 on Top Layer "NETC6_2_L01_P086" (solid, remove dead copper, pour order 86): -333.3,3339.5 -333.3,3296.9 -376.2,3254 -376.2,3164.3 -319.6,3164.3 -319.3,3164 -305.9,3177.4 -305.9,3337.8
NetC16_2 on Top Layer "NETC16_2_L01_P020" (solid, remove dead copper, pour order 20): -155.9,2606.7 -14.6,2606.7 3.67,2588.43 3.67,2527.5 -60.7,2527.5 -60.7,2508.5 -155.2,2508.5
VCC_12V on Top Layer "VCC_12V_L01_P019" (solid, remove dead copper, pour order 19): -12.23,2545.6 14.17,2572 149.07,2572 160.97,2560.1 160.97,2520 140.87,2499.9 9.78,2499.9 -11.62,2521.3
M2EKEY_3V3 on Top Layer "M2EKEY_3V3_L01_P008" (solid, remove dead copper, pour order 8): 270.97,1072.6 270.97,1109.67 350.5,1189.2 765.2,1189.2 877.2,1077.2 877.2,985.5 867,975.3 782.4,975.3 672.3,1085.4 358.63,1085.4 334.43,1061.2 337.87,1057.76 337.87,970.1 277.27,970.1 273.92,973.45
NetC210_1 on Top Layer "NETC210_1_L01_P083" (solid, remove dead copper, pour order 83): 2589,347.5 2582.9,341.4 2582.9,152.7 2581.4,152.7 2560.3,131.6 2526.6,131.6 2509.4,148.8 2509.4,190.8 2507.3,190.8 2501.5,196.6 2477.4,196.6 2477.4,176.8 2477.4,117.9 2490.2,105.1 2533.5,105.1 2533.5,19.4 2649,-96.1 2697.5,-96.1 2708.5,-85.1 2704.5,-81.1 2704.5,263.4 2699.4,268.5 2697.3,266.4 2650.3,266.4 2622.2,294.5 2622.2,349.6
VCC_5V0_S0 on Top Layer "VCC_5V0_S0_L01_P082" (solid, remove dead copper, pour order 82): -702.4,3249.8 -702.1,3249.5 -632.5,3249.5 -632.5,3249.6 -626.1,3256 -626.1,3328.8 -631,3333.7 -699,3333.7 -701.9,3330.8
VCC4V0_SYS on Top Layer "VCC4V0_SYS_L01_P069" (solid, remove dead copper, pour order 69): -322.8,2661.4 -315.2,2669 -315.2,2670.9 -243,2670.9 -238.6,2666.5 -238.6,2464.8 -252.1,2451.3 -315.6,2451.3 -322.8,2458.5
VCC4V0_SYS on Top Layer "VCC4V0_SYS_L01_P066" (solid, remove dead copper, pour order 66): 243.7,157.8 244.6,156.9 244.6,78.9 132.8,78.9 131.9,78 129.3,80.6 129.3,156
VCC_12V on Top Layer "VCC_12V_L01_P065" (solid, remove dead copper, pour order 65): -326.14,922.6 -270.3,922.6 -262.1,930.8 -262.1,989.4 -266.9,994.2 -317.8,994.2 -327.21,984.79
VCC_12V on Top Layer "VCC_12V_L01_P064" (solid, remove dead copper, pour order 64): -250.4,687.4 -180.3,687.4 -180.3,688.5 -176.2,692.6 -176.7,693.1 -176.7,744.7 -181.7,749.7 -248.4,749.7 -252,746.1 -252,688.3
VCC_12V on Top Layer "VCC_12V_L01_P061" (solid, remove dead copper, pour order 61): -381.7,2198.7 -373.2,2190.2 -373.2,2185.6 -266.9,2185.6 -262.4,2190.1 -263.3,2191 -263.3,2228.6 -268.9,2234.2 -380.4,2234.2 -382.1,2232.5
VCC_12V on Top Layer "VCC_12V_L01_P063" (solid, remove dead copper, pour order 63): 295.8,917.8 295.8,927.5 305.1,936.8 404.6,936.8 410.6,930.8 410.6,884.1 405.8,879.3 298.4,879.3 295.9,881.8
VCC_12V on Top Layer "VCC_12V_L01_P062" (solid, remove dead copper, pour order 62): 4.8,914.9 19.9,930 122.7,930 127.6,925.1 127.5,925 127.5,881.6 121.5,875.6 4,875.6
VCC_12V on Top Layer "VCC_12V_L01_P058" (solid, remove dead copper, pour order 58): -296.5,3337.6 -296.5,3338.8 -283,3352.3 -203.4,3352.3 -199.9,3348.8 -199.9,3296.2 -206.4,3289.7 -289.4,3289.7 -295.8,3296.1
VCC_12V on Top Layer "VCC_12V_L01_P057" (solid, remove dead copper, pour order 57): -606.2,3360.7 -605.5,3360 -569.1,3360 -556.1,3347 -556.1,3266.8 -565.4,3257.5 -618.7,3257.5 -622.4,3261.2 -620.6,3263 -620.6,3349.2
VCC_12V on Top Layer "VCC_12V_L01_P056" (solid, remove dead copper, pour order 56): -607.3,3482.8 -606.6,3482.1 -564.7,3482.1 -555.4,3491.4 -555.4,3580.5 -560.3,3585.4 -612.2,3585.4 -612.2,3584.6 -614.7,3582.1 -614.3,3581.7 -614.3,3489.3 -608.5,3483.5
VDD_LCD0_3V3 on Top Layer "VDD_LCD0_3V3_L01_P050" (solid, remove dead copper, pour order 50): -308.1,3553.5 -308,3553.4 -228.2,3553.4 -203.6,3578 -167.4,3578 -142.6,3553.2 -142.6,3540.8 -143.1,3540.8 -150.2,3533.7 -187.2,3533.7 -187.2,3530.4 -209.2,3508.4 -212.6,3511.8 -332.8,3511.8 -343.9,3522.9 -342.6,3524.2 -342.6,3551.1
VDD_LCD0_3V3 on Top Layer "VDD_LCD0_3V3_L01_P049" (solid, remove dead copper, pour order 49): -374.2,3644.9 -374.1,3645 -340.4,3645 -340.4,3644.7 -336.4,3640.7 -336.4,3583.3 -336.3,3583.3 -331.3,3578.3 -330.6,3579 -303.3,3579 -303.3,3578.8 -298.2,3573.7 -298.2,3530.6 -306.3,3522.5 -306.8,3523 -348.9,3523 -373.2,3547.3
VCC_RTC on Top Layer "VCC_RTC_L01_P047" (solid, remove dead copper, pour order 47): 2342.7,1717.7 2343.2,1717.2 2380.8,1717.2 2390.6,1707.4 2390.6,1620.6 2386.6,1616.6 2319.2,1616.6 2310.1,1625.7 2310.1,1685.7
VCCA3V3_CODEC on Top Layer "VCCA3V3_CODEC_L01_P046" (solid, remove dead copper, pour order 46): 2344.7,724.7 2344.7,799.6 2351.65,806.55 2434.75,806.55 2460.5,780.8 2460.5,771.4 2370.6,771.4 2352.4,753.2 2352.4,724.4
VCCA1V8_CODEC on Top Layer "VCCA1V8_CODEC_L01_P044" (solid, remove dead copper, pour order 44): 2273.4,597 2299.8,597 2303,593.8 2303,552.3 2303.9,552.3 2308.1,548.1 2308.2,548.2 2357.9,548.2 2357.9,526.2 2355.7,524 2169.6,524 2129.8,563.8 2129.8,632.4 2134.2,636.8 2166.1,636.8 2174.9,628 2174.9,595.3 2219.1,551.1 2273,551.1
VCC5V0_USB20_HOST on Top Layer "VCC5V0_USB20_HOST_L01_P039" (solid, remove dead copper, pour order 39): 1423.4,3224.8 1420.9,3227.3 1420.9,3306.9 1458,3344 1458,3533.9 1478.9,3554.8 1479.2,3554.5 1558.6,3554.5 1570.4,3542.7 1569,3541.3 1569,3205 1511.6,3147.6 1424.5,3147.6
VCC3V3_PCIECLK on Top Layer "VCC3V3_PCIECLK_L01_P038" (solid, remove dead copper, pour order 38): 204.8,2101.8 205.7,2100.9 325.6,2100.9 333,2093.5 332.5,2093 332.5,2028.8 205.6,2028.8 204,2030.4
SATA_12V on Top Layer "SATA_12V_L01_P035" (solid, remove dead copper, pour order 35): -230.5,914 -180.3,914 -176.8,917.5 -176.8,1049.5 -179.2,1051.9 -230.4,1051.9
NetL7_1 on Top Layer "NETL7_1_L01_P000" (solid, remove dead copper, pour order 0): 266.56,525.68 276.06,535.18 276.06,616.58 287.16,627.68 372.36,627.68 372.36,545.78 372.16,545.58 303.16,545.58 296.56,538.98 296.56,519.68 266.66,519.68 266.26,519.28
1V8_DVDD_PHY1 on Top Layer "1V8_DVDD_PHY1_L01_P028" (solid, remove dead copper, pour order 28): 354.7,536.6 354.6,536.7 312.5,536.7 312.5,536.2 297.5,521.2 297.5,502.6 291.7,496.8 291.4,497.1 267.3,497.1 267.3,486 267.8,485.5 311.1,485.5 311.1,485.8 328.8,503.5 329,503.3 359.4,503.3 362.4,506.3 362.4,536.6
3V3_AVDD_PHY1 on Top Layer "3V3_AVDD_PHY1_L01_P031" (solid, remove dead copper, pour order 31): 7.3,360.3 66.5,360.3 76.4,370.2 115.1,370.2 117.3,368 117.3,337.9 108.7,329.3 62.2,329.3 52.7,319.8 1.9,319.8 -0.6,322.3 -0.6,353
3V3_AVDD_PHY1 on Top Layer "3V3_AVDD_PHY1_L01_P029" (solid, remove dead copper, pour order 29): 111.5,536.3 13.1,536.3 7.8,541.6 8,541.8 8,561.7 16.4,570.1 113.8,570.1 117.2,566.7 117.2,537.1
NetC14_2 on Top Layer "NETC14_2_L01_P017" (solid, remove dead copper, pour order 17): -612.31,3586.58 -612.81,3586.08 -740.61,3586.08 -750.21,3595.68 -750.21,3667.58 -663.11,3667.58 -632.91,3637.38 -632.91,3621.38 -620.51,3621.38 -613.51,3614.38 -576.51,3614.38 -576.51,3588.28 -577.71,3587.08
NetC224_2 on Top Layer "NETC224_2_L01_P018" (solid, remove dead copper, pour order 18): -607.29,3369.7 -607.49,3369.5 -737.19,3369.5 -750.29,3382.6 -750.29,3450.7 -660.69,3450.7 -606.69,3396.7 -572.89,3396.7 -571.99,3397.6 -571.39,3397 -571.39,3370.1
NetF1_1 on Top Layer "NETF1_1_L01_P016" (solid, remove dead copper, pour order 16): -218.9,2849.4 -218.5,2849 -218.5,2779.7 -241.9,2756.3 -491.7,2756.3 -512.4,2777 -512.4,2839.6 -502.3,2849.7
VCC12V_PCIEx4 on Top Layer "VCC12V_PCIEX4_L01_P015" (solid, remove dead copper, pour order 15): -837,2683 -815.7,2704.3 -430.3,2704.3 -404.9,2678.9 -404.9,2568.5 -440.2,2533.2 -817.1,2533.2 -837,2553.1
VCC3V3_PCIEx4 on Top Layer "VCC3V3_PCIEX4_L01_P014" (solid, remove dead copper, pour order 14): -425.63,2386.2 -831.2,2386.2 -840,2377.4 -835.7,2373.1 -835.7,2261 -813.4,2238.7 -812.9,2239.2 -486.88,2239.2 -428.18,2297.9
VCC3V3_PCIEx4 on Top Layer "VCC3V3_PCIEX4_L01_P013" (solid, remove dead copper, pour order 13): -414.18,2386 -332.28,2386 -322.28,2376 -323.78,2374.5 -323.78,2278.5 -385.78,2278.5 -405.18,2297.9 -428.18,2297.9 -437.08,2306.8 -437.08,2386.2
NetC179_2 on Top Layer "NETC179_2_L01_P012" (solid, remove dead copper, pour order 12): -254.48,2228.3 -253.98,2228.8 -253.98,2363.4 -249.58,2367.8 -181.08,2367.8 -181.08,2272.82 -226.48,2227.42 -226.48,2192 -226.68,2191.8 -227.18,2192.3 -253.68,2192.3
SATA_5V0 on Top Layer "SATA_5V0_L01_P011" (solid, remove dead copper, pour order 11): -463.8,981.8 -439.6,1006 -354.6,1006 -354.6,966 -250.3,861.7 -243.5,861.7 -243.5,773 -242.4,771.9 -244.3,770 -274.8,770 -463.36,958.56
M2PCIE_3V3 on Top Layer "M2PCIE_3V3_L01_P006" (solid, remove dead copper, pour order 6): -4.5,1073.3 -4.2,1073.6 61.2,1073.6 63.9,1070.9 63.9,975.7 -17,975.7 -43.8,1002.5 -43.8,1070.9
NetC156_2 on Top Layer "NETC156_2_L01_P005" (solid, remove dead copper, pour order 5): 135.8,886.2 136.2,886.6 136.2,1049.6 149.8,1063.2 150.2,1062.8 204.3,1062.8 204.3,975.3 162.7,933.7 162.7,886.2 163,885.9
NetC127_2 on Top Layer "NETC127_2_L01_P003" (solid, remove dead copper, pour order 3): 421.07,885.6 420.87,885.8 420.87,1060.7 479.47,1060.7 480.07,1061.3 480.17,1061.2 480.17,951.7 446.97,918.5 446.97,885.6
M2EKEY_3V3 on Top Layer "M2EKEY_3V3_L01_P004" (solid, remove dead copper, pour order 4): 337.97,1061.2 283.37,1061.2 271.47,1073.1 270.97,1072.6 244.47,1072.6 233.37,1061.5 233.37,992.5 255.77,970.1 337.87,970.1
NetC283_2 on Top Layer "NETC283_2_L01_P001" (solid, remove dead copper, pour order 1): -168.12,689.07 -170.72,691.67 -170.72,855.57 -165.62,860.67 -164.52,859.57 -102.92,859.57 -102.92,772.27 -133.52,741.67 -133.52,728.65 -138.14,728.65 -144.72,722.07 -143.62,720.97 -143.62,686.87
SATA_5V0 on Top Layer "SATA_5V0_L01_P002" (solid, remove dead copper, pour order 2): -266.62,690.37 -244.82,712.17 -244.82,859.47 -296.52,859.47 -299.72,856.27 -299.72,689.17
GND on Layer 4 "GND_L04_P089" (solid, remove dead copper, pour order 89): -857,-166.7 3040.6,-166.7 3040.6,3730.9 -857,3730.9
VCC_12V on Layer 4 "VCC_12V_L04_P055" (solid, remove dead copper, pour order 55): -630.2,3581.6 -628.2,3579.6 -432.3,3579.6 201.1,2946.2 201.1,2541.8 -108.8,2231.9 -108.8,1020.3 -52.2,963.7 384.9,963.7 446.7,901.9 446.7,783.7 410,747 -45.1,747 -45.1,737.8 -153.6,629.3 -324.9,629.3 -419.7,724.1 -419.7,2850.1 -633.8,3064.2 -633.8,3139.7
VCC_5V0_S0 on Layer 4 "VCC_5V0_S0_L04_P081" (solid, remove dead copper, pour order 81): -253.3,3645.2 -253.3,3711.9 -233.5,3731.7 495.1,3731.7 512.8,3714 510.87,3712.07 510.87,3326.77 498.1,3314 435,3314 415.1,3333.9 416.2,3335 416.2,3516.7 362.2,3570.7 357.5,3566 -254,3566
VCC5V0_USB_S0 on Layer 4 "VCC5V0_USB_S0_L04_P073" (solid, remove dead copper, pour order 73): 1170.1,3587.9 1401,3587.9 1419.4,3606.3 1419.4,3640.1 1413.8,3645.7 1166.3,3645.7 1162.5,3641.9 1162.5,3593.5
VDD_LCD0_5V on Layer 4 "VDD_LCD0_5V_L04_P054" (solid, remove dead copper, pour order 54): -221.4,3453.5 74.1,3453.5 93.3,3472.7 306.1,3472.7 372.7,3406.1 401.1,3406.1 414.9,3419.9 414.9,3513.9 362.6,3566.2 -179.1,3566.2 -222.8,3522.5
VCC_3V3_S0 on Layer 3 "VCC_3V3_S0_L03_P075" (solid, remove dead copper, pour order 75): -858.3,3731.3 -858,3731 3040.4,3731 3040.4,-166.7 3040.5,-166.8 3039.7,-167.6 347.5,-167.6 347.5,177.8 343.5,177.8 169.8,351.5 169.8,1909.5 1546.2,1909.5 1546.2,40.2 2565.6,40.2 2694.3,168.9 2694.3,3162.8 2486.1,3371 -855,3371
VCC_5V0_S0 on Layer 3 "VCC_5V0_S0_L03_P080" (solid, remove dead copper, pour order 80): -855.8,3369.6 -853.1,3366.9 2484.2,3366.9 2484.2,3366.2 2687.9,3162.5 2686.3,3160.9 2686.3,179.4 2555.1,48.2 1553.4,48.2 1553.4,1918.2 550.7,1918.2 214.3,1918.2 178.5,1954 178.5,2581.7 82.4,2677.8 -854.08,2677.8
VCC4V0_SYS on Layer 3 "VCC4V0_SYS_L03_P067" (solid, remove dead copper, pour order 67): -857.04,2672.3 89.3,2672.3 168.6,2593 168.6,168.8 352,168.8 352,-166.7 -857.04,-166.7
VCC4V0_SYS on Layer 3 "VCC4V0_SYS_L03_P068" (solid, remove dead copper, pour order 68): 352,168.8 350.9,168.8 38.6,481.1 18.3,481.1 18.3,67.5 41.4,44.4 350.7,44.4
VCC5V0_USB_S0 on Layer 3 "VCC5V0_USB_S0_L03_P074" (solid, remove dead copper, pour order 74): -234.2,3254.9 605.1,3254.9 746.1,3113.9 800.9,3113.9 824.5,3090.3 824.5,3044.5 -114.3,3044.5 -233.8,3164
GND on Layer 2 (split plane): 3020.5,-146.6 -836.94,-146.6 -836.94,3710.84 3020.5,3710.84
GND on Layer 1 (split plane): 3020.5,-146.6 -836.94,-146.6 -836.94,3710.84 3020.5,3710.84

## Other copper
Top Layer:
  pour cut-out: -156.1,3427.5 -6.2,3277.6 -6.2,3232.02 68.8,3157.02 68.8,3154.2 123.6,3154.2 130.6,3161.2 118.9,3172.9 118.9,3232.2 116.22,3232.2 -106.54,3454.96 -165.56,3454.96
  pour cut-out: 2806.22,334.18 2820.72,334.18 2889.81,265.09 2889.81,131.48 2968.82,131.48 2975.6,124.7 3038.5,124.7 3038.5,523.35 3023.36,538.49 2871.47,386.6 2804.1,386.6
  pour cut-out: 2611.4,845.9 2611.4,772 2669.5,713.9 2787.9,713.9 2787.9,752.93 2826.2,791.24 2822.2,795.24 2822.2,856 2811.6,856 2775,892.6 2774.8,892.4 2624.5,892.4
  pour cut-out: 1757.3,2260.2 1757.3,2165.1 1791.7,2130.7 1793.6,2132.6 1990.5,2132.6 1990.5,2151.35 1986.91,2154.94 1986.91,2279.71
  pour cut-out: 1299.2,2242.3 1312.38,2229.12 1391.51,2229.12 1391.51,2221.69 1448.7,2164.5 1460.4,2176.2 1597.8,2176.2 1597.8,2246.57 1506.52,2337.86 1496.86,2328.2 1298.9,2328.2
  pour cut-out: 164.31,3222.91 154.9,3213.49 154.9,3113.3 391.6,2876.6 618.4,2876.6 618.4,3033 427.69,3223.71 211.66,3223.71
Layer 4:
  pour cut-out: 2160.7,1472.86 2160.7,1347.16 2226.78,1281.09 2266.7,1321.01 2266.7,1337.2 2207.5,1396.4 2207.5,1478.6

## Silkscreen, mask and mechanical layers (free items; w line width, h text height)
Top Overlay:
  lines w3: -213.8,549.9 -213.8,557.4 ; -205.4,557.5 -213.6,557.5 -201.8,545.7 -80.1,545.7 -45.2,580.6 -45.2,618.9
  lines w5: 2723.1,470.4 2744.2,470.4 2775.4,501.6 2852.3,501.6 2878.3,527.6 2878.3,513.3 2878.1,513.5 2878.1,527.4 2877.9,527.6 2865.6,527.6
  lines w10: -437.1,1121.7 -389.5,1169.3 -389.5,1212.6 ; -437,1150.4 -437.1,1150.3 -437.1,1120.6 -405.8,1120.6 ; -211,1200.9 -193.3,1183.2 -193.3,1297 ; -192.7,1183.5 -192.5,1183.5 -176.4,1199.6 ; 2175.2,1906.2 2490.7,1906.2 2468.5,1884 ; 2466.6,1929.9 2468.7,1929.9 2489.7,1908.9 2489.7,1905.4 ; 2490.5,1907.1 2490.7,1907.1 ; -78.72,-78.73 2952.77,-78.73 2952.77,2755.91 -78.72,2755.91 -78.72,-78.73 ; 1358.1,1324 2164.6,1324 2164.6,1944.7 1358.1,1944.7 1358.1,1324
  text "MIPI DSI" at -93.6,3345 h60
  text "12V IN" at -836.5,3205.2 h40
  text "Typec" at 438.8,3016.79 h60
  text "&" at 772.2,3013.9 h60
  text "USB 3.0" at 1118.5,3010.9 h60
  text "DP" at 861.9,3008.2 h60
  text "HDMI" at 1775.6,2800.5 h60
  text "HDMI" at 2461.7,2800.1 h60
  text "TX" at 2024.8,2799 h60
  text "TX" at 2710.9,2798.6 h60
  text "2.1" at 2176.7,2798.2 h60
  text "2.1" at 2862.8,2797.8 h60
  text "SD  CARD" at 2309.7,2677.4 h60
  text "GPIO PIN" at 1642.1,1884.3 h25
  text "6B7 6B0" at 1381.8,1830.19 h25
  text "PCIE" at -463.3,1814 h60
  text "6B6 6A7" at 1381.8,1792.7 h25
  text "6B3 6A6" at 1381.8,1755.2 h25
  text "Ethernet" at -213.8,1753.2 h60 r270
  text "6B2 6A5" at 1381.8,1717.7 h25
  text "3.0" at -464.8,1705.3 h60
  text "1B7 1D7" at 1381.8,1652.1 h25
  text "I2C5_SDA_M3 I2C8_SDA_M2" at 1576.3,1651.87 h25
  text "1B6 1D6" at 1381.8,1614.43 h25
  text "I2C5_SCL_M3 I2C8_SCL_M2" at 1576.3,1610.77 h25
  text "X2" at -464.8,1594.2 h60
  text "1D5 3A6" at 1381.8,1576.77 h25
  text "6A4 6B1" at 1381.8,1539.1 h25
  text "5V  GND" at 1381.8,1480.97 h25
  text "SATA" at -422.2,1465.7 h60 r270
  text "3.3V 1C1" at 1381.8,1441.28 h25
  text "UART7_RX_M2 UART4_RX_M2" at 1576.3,1402.67 h25
  text "1B4 1B2" at 1381.8,1401.59 h25
  text "1B5 1B3" at 1381.8,1361.9 h25
  text "UART7_TX_M2 UART4_TX_M2" at 1576.3,1361.67 h25
  text "POWER" at 1474.9,-147.5 h25
  text "SYS_LED" at 1655.2,-147.93 h25
Bottom Overlay:
  drawing of 133 lines, arcs and shapes, not listed
  text "Debug" at 2818,2654.76 h50
  text "Speaker" at 1313.4,2651.99 h60
  text "GPIO PIN" at 1945.8,2576.8 h25
  text "6B0 6B7" at 2206.1,2522.69 h25
  text "6A7 6B6" at 2206.1,2485.2 h25
  text "6A6 6B3" at 2206.1,2447.7 h25
  text "6A5 6B2" at 2206.1,2410.2 h25
  text "Channal" at 770.9,2397.6 h40
  text "1D7 1B7" at 2206.1,2344.6 h25
  text "I2C8_SDA_M2 I2C5_SDA_M3" at 2011.6,2344.37 h25
  text "1D6 1B6" at 2206.1,2306.93 h25
  text "I2C8_SCL_M2 I2C5_SCL_M3" at 2011.6,2303.27 h25
  text "L" at 464.5,2279.2 h40
  text "3A6 1D5" at 2206.1,2269.27 h25
  text "6B1 6A4" at 2206.1,2231.6 h25
  text "GND 5V" at 2206.1,2173.47 h25
  text "1C1 3.3V" at 2206.1,2133.78 h25
  text "UART4_RX_M2 UART7_RX_M2" at 2011.6,2095.17 h25
  text "1B2 1B4" at 2206.1,2094.09 h25
  text "R" at 469.8,2080.9 h40
  text "UART4_TX_M2 UART7_TX_M2" at 2011.6,2054.17 h25
  text "1B3 1B5" at 2206.1,2054.4 h25
  text "M2 M KEY" at 147.1,2005.1 h40
  text "RTC" at 2316.8,1807.6 h40
  text "POWER" at 3002.8,1460.5 h20 r90
  text "RESET" at 3002.8,1345.8 h20 r90
  text "RECOVERY" at 3002.8,1228.8 h20 r90
  text "MASKROM" at 3002.8,1045.3 h20 r90
  text "EARPHONE" at 2600.4,887.7 h50
  text "R OUT" at 2792.1,509.2 h20 r90
  text "L OUT" at 2799.6,268.2 h20 r90
  text "M2 E KEY" at 919.1,173.6 h40
  text "Rockchip RK3588" at 1272.72,15.59 h60
Mechanical 1:
  circle w10: c-514.2,1146 r41.34
  circle w10: c2874.02,0 r41.34
  circle w10: c2367.3,3549.8 r41.34
  circle w10: c-70.87,3244.09 r41.34
  circle w10: c1954.16,678.45 r41.34
  circle w10: c2935.37,1556.15 r41.34
  circle w10: c0,0 r41.34
  circle w10: c2874.02,2677.17 r41.34
  circle w10: c0,2677.17 r41.34
  lines w10: -857.04,-166.7 3040.6,-166.7 3040.6,3730.94 -857.04,3730.94 -857.04,-166.7

## Text inside footprints (layer, text, board x,y; h text height)
J13: Bottom Overlay "32" at 1007.39,771.28 h30 r90; Bottom Overlay "22" at 1007.39,859.86 h30 r90; Bottom Overlay "2" at 1007.39,1052.78 h30 r90; Bottom Overlay "74" at 1015.6,349.31 h30 r90; Mechanical 15 "62" at 936.45,430.6 h10; Mechanical 15 "44" at 936.45,607.76 h10; Mechanical 15 "46" at 936.45,588.08 h10; Mechanical 15 "48" at 936.45,568.39 h10; Mechanical 15 "60" at 936.45,450.28 h10; Mechanical 15 "58" at 936.45,469.97 h10; Mechanical 15 "6" at 936.45,985.78 h10; Mechanical 15 "16" at 936.45,883.36 h10; Mechanical 15 "8" at 936.45,966.1 h10; Mechanical 15 "12" at 936.45,922.73 h10; Mechanical 15 "14" at 936.45,903.04 h10; Mechanical 15 "10" at 936.45,942.41 h10; Mechanical 15 "64" at 936.45,410.91 h10; Mechanical 15 "67" at 637.23,381.39 h10; Mechanical 15 "65" at 637.23,401.07 h10; Mechanical 15 "61" at 637.23,440.44 h10; Mechanical 15 "59" at 637.23,460.13 h10; Mechanical 15 "73" at 637.23,322.33 h10; Mechanical 15 "71" at 637.23,342.02 h10; Mechanical 15 "9" at 631.33,953.04 h10; Mechanical 15 "11" at 625.42,925.36 h10; Mechanical 15 "13" at 625.42,905.67 h10; Mechanical 15 "15" at 625.42,885.99 h10; Mechanical 15 "17" at 625.42,866.3 h10; Mechanical 15 "19" at 625.42,846.62 h10; Mechanical 15 "23" at 625.42,807.25 h10; Mechanical 15 "21" at 625.42,826.93 h10; Mechanical 15 "50" at 936.45,548.71 h10; Mechanical 15 "34" at 936.45,706.19 h10; Mechanical 15 "36" at 936.45,686.51 h10; Mechanical 15 "22" at 936.45,824.3 h10; Mechanical 15 "32" at 936.45,725.88 h10; Mechanical 15 "20" at 936.45,843.99 h10; Mechanical 15 "68" at 936.45,371.54 h10; Mechanical 15 "70" at 936.45,351.86 h10; Mechanical 15 "66" at 936.45,391.23 h10; Mechanical 15 "38" at 936.45,666.82 h10; Mechanical 15 "40" at 936.45,647.13 h10; Mechanical 15 "42" at 936.45,627.45 h10; Mechanical 15 "54" at 936.45,509.34 h10; Mechanical 15 "41" at 637.23,637.29 h10; Mechanical 15 "72" at 936.45,332.17 h10; Mechanical 15 "74" at 936.45,312.49 h10; Mechanical 15 "2" at 928.57,1021.94 h10; Mechanical 15 "4" at 936.45,1005.47 h10; Mechanical 15 "3" at 631.33,1012.1 h10; Mechanical 15 "35" at 637.23,696.35 h10; Mechanical 15 "53" at 637.23,519.18 h10; Mechanical 15 "5" at 631.33,992.41 h10; Mechanical 15 "55" at 637.23,499.5 h10; Mechanical 15 "52" at 936.45,529.02 h10; Mechanical 15 "56" at 936.45,489.65 h10; Mechanical 15 "37" at 637.23,676.66 h10; Mechanical 15 "1" at 631.33,1031.78 h10; Mechanical 15 "76" at 669.71,1068.21 h25 r90; Mechanical 15 "77" at 669.71,253.25 h25 r90; Mechanical 15 "75" at 637.23,302.65 h10; Mechanical 15 "69" at 637.23,361.7 h10; Mechanical 15 "63" at 637.23,420.76 h10; Mechanical 15 "57" at 637.23,479.81 h10; Mechanical 15 "39" at 637.23,656.98 h10; Mechanical 15 "51" at 637.23,538.87 h10; Mechanical 15 "45" at 637.23,597.92 h10; Mechanical 15 "33" at 637.23,716.03 h10; Mechanical 15 "7" at 631.33,972.73 h10; Mechanical 15 "18" at 936.45,863.67 h10; Mechanical 15 "43" at 637.23,617.61 h10; Mechanical 15 "49" at 637.23,558.55 h10; Mechanical 15 "47" at 637.23,578.24 h10
J19: Mechanical 15 "69" at -338.71,1267.41 h25 r90; Mechanical 15 "56" at -58.2,1397.33 h25 r90; Mechanical 15 "58" at -58.2,1377.65 h25 r90; Mechanical 15 "6" at -58.2,1879.46 h25 r90; Mechanical 15 "34" at -58.2,1613.87 h25 r90; Mechanical 15 "36" at -58.2,1594.18 h25 r90; Mechanical 15 "40" at -58.2,1554.81 h25 r90; Mechanical 15 "42" at -58.2,1535.13 h25 r90; Mechanical 15 "44" at -58.2,1515.44 h25 r90; Mechanical 15 "46" at -58.2,1495.76 h25 r90; Mechanical 15 "48" at -58.2,1476.07 h25 r90; Mechanical 15 "67" at -338.71,1302.85 h25 r90; Mechanical 15 "8" at -58.2,1859.78 h25 r90; Mechanical 15 "20" at -58.2,1751.67 h25 r90; Mechanical 15 "22" at -58.2,1731.98 h25 r90; Mechanical 15 "24" at -58.2,1712.3 h25 r90; Mechanical 15 "26" at -58.2,1692.61 h25 r90; Mechanical 15 "28" at -58.2,1672.92 h25 r90; Mechanical 15 "30" at -58.2,1653.24 h25 r90; Mechanical 15 "32" at -58.2,1633.55 h25 r90; Mechanical 15 "17" at -351.5,1781.19 h25 r90; Mechanical 15 "5" at -351.5,1889.3 h25 r90; Mechanical 15 "19" at -351.5,1761.51 h25 r90; Mechanical 15 "7" at -351.5,1869.62 h25 r90; Mechanical 15 "23" at -351.5,1722.14 h25 r90; Mechanical 15 "11" at -351.5,1840.25 h25 r90; Mechanical 15 "25" at -351.5,1702.45 h25 r90; Mechanical 15 "13" at -351.5,1820.56 h25 r90; Mechanical 15 "68" at -47.37,1287.1 h25 r90; Mechanical 15 "41" at -351.5,1544.97 h25 r90; Mechanical 15 "54" at -58.2,1417.02 h25 r90; Mechanical 15 "43" at -351.5,1525.29 h25 r90; Mechanical 15 "52" at -58.2,1436.7 h25 r90; Mechanical 15 "53" at -351.5,1426.86 h25 r90; Mechanical 15 "55" at -351.5,1407.18 h25 r90; Mechanical 15 "10" at -58.2,1850.09 h25 r90; Mechanical 15 "50" at -58.2,1456.39 h25 r90; Mechanical 15 "38" at -58.2,1574.5 h25 r90; Mechanical 15 "49" at -351.5,1466.23 h25 r90; Mechanical 15 "35" at -351.5,1604.03 h25 r90; Mechanical 15 "72" at -47.37,1239.85 h25 r90; Mechanical 15 "70" at -47.37,1263.48 h25 r90; Mechanical 15 "74" at -47.37,1216.23 h25 r90; Mechanical 15 "18" at -58.2,1771.35 h25 r90; Mechanical 15 "16" at -58.2,1791.04 h25 r90; Mechanical 15 "14" at -58.2,1810.72 h25 r90; Mechanical 15 "12" at -58.2,1830.41 h25 r90; Mechanical 15 "4" at -58.2,1899.15 h25 r90; Mechanical 15 "2" at -58.2,1918.83 h25 r90; Mechanical 15 "37" at -351.5,1584.34 h25 r90; Mechanical 15 "47" at -351.5,1485.92 h25 r90; Mechanical 15 "1" at -351.5,1928.67 h25 r90; Mechanical 15 "73" at -338.71,1228.04 h25 r90; Mechanical 15 "45" at -351.5,1505.6 h25 r90; Mechanical 15 "51" at -351.5,1446.55 h25 r90; Mechanical 15 "57" at -351.5,1387.49 h25 r90; Mechanical 15 "39" at -351.5,1564.66 h25 r90; Mechanical 15 "33" at -351.5,1623.71 h25 r90; Mechanical 15 "27" at -351.5,1682.77 h25 r90; Mechanical 15 "75" at -338.71,1208.36 h25 r90; Mechanical 15 "71" at -338.71,1251.66 h25 r90; Mechanical 15 "21" at -351.5,1741.82 h25 r90; Mechanical 15 "15" at -351.5,1800.88 h25 r90; Mechanical 15 "9" at -351.5,1849.93 h25 r90; Mechanical 15 "3" at -351.5,1908.99 h25 r90; Mechanical 15 "76" at -323.94,1167.02 h25 r90; Mechanical 15 "77" at -323.94,1981.98 h25 r90; Mechanical 15 "29" at -351.5,1663.08 h25 r90; Mechanical 15 "31" at -351.5,1643.4 h25 r90